# Altium PCB inAmp.PcbDoc
Units mm, origin at the board's own origin, x right, y up, seen from the top; angles counter-clockwise.
Board outline 100 x 50 mm, 2 copper layers (Top Layer, Bottom Layer); 21 components, 18 nets, 64 pads, 11 vias.
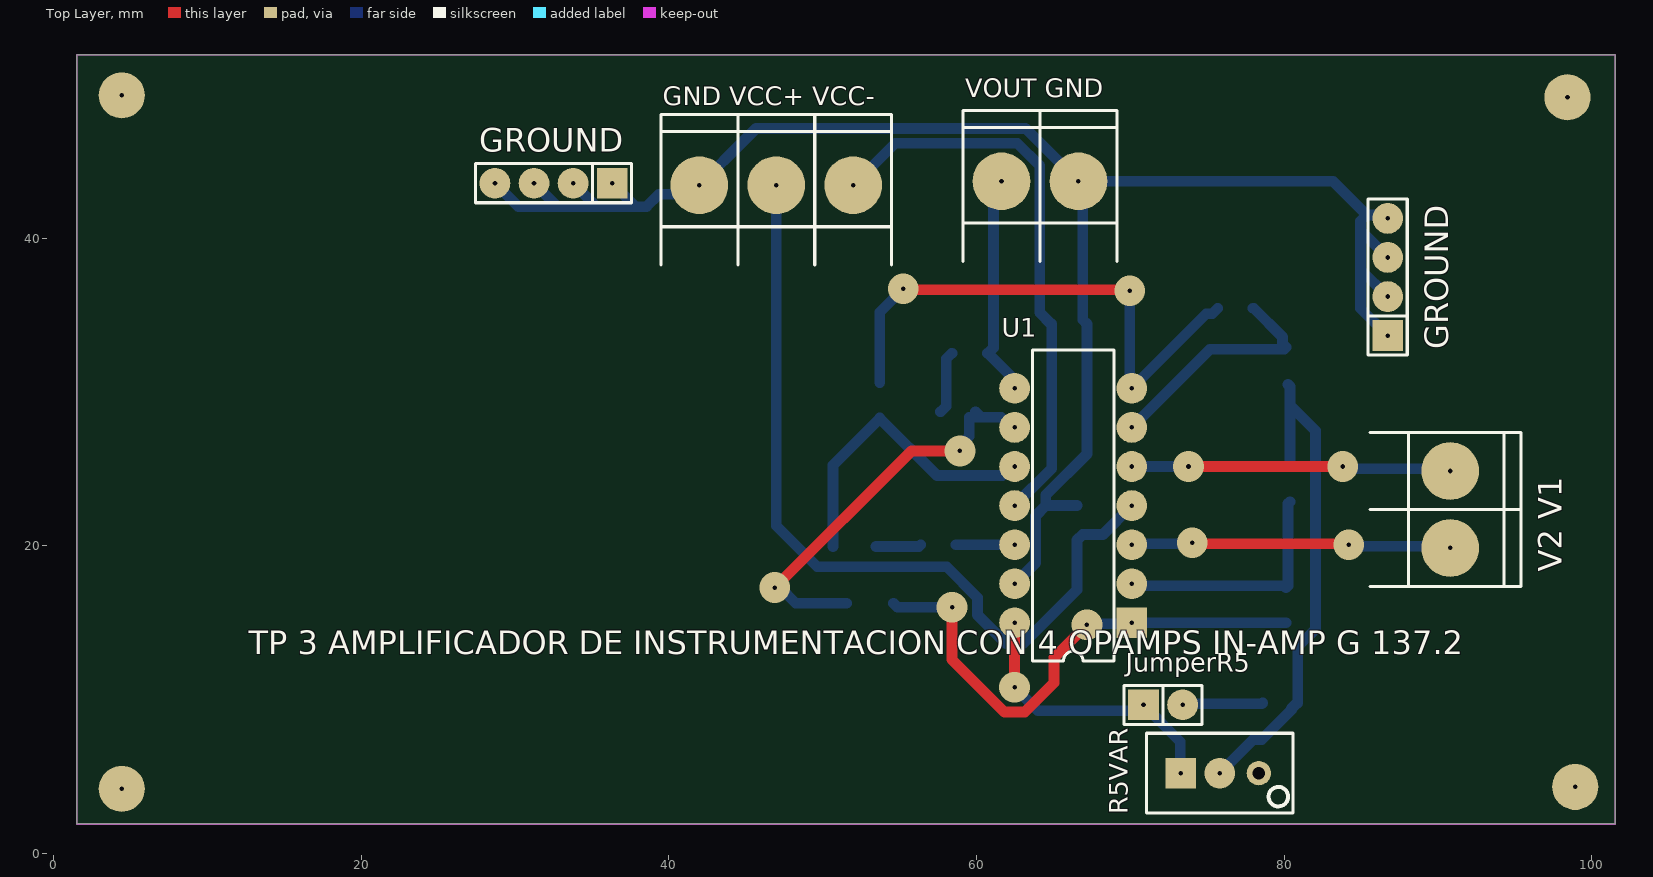
[diagram p0: Top Layer view]
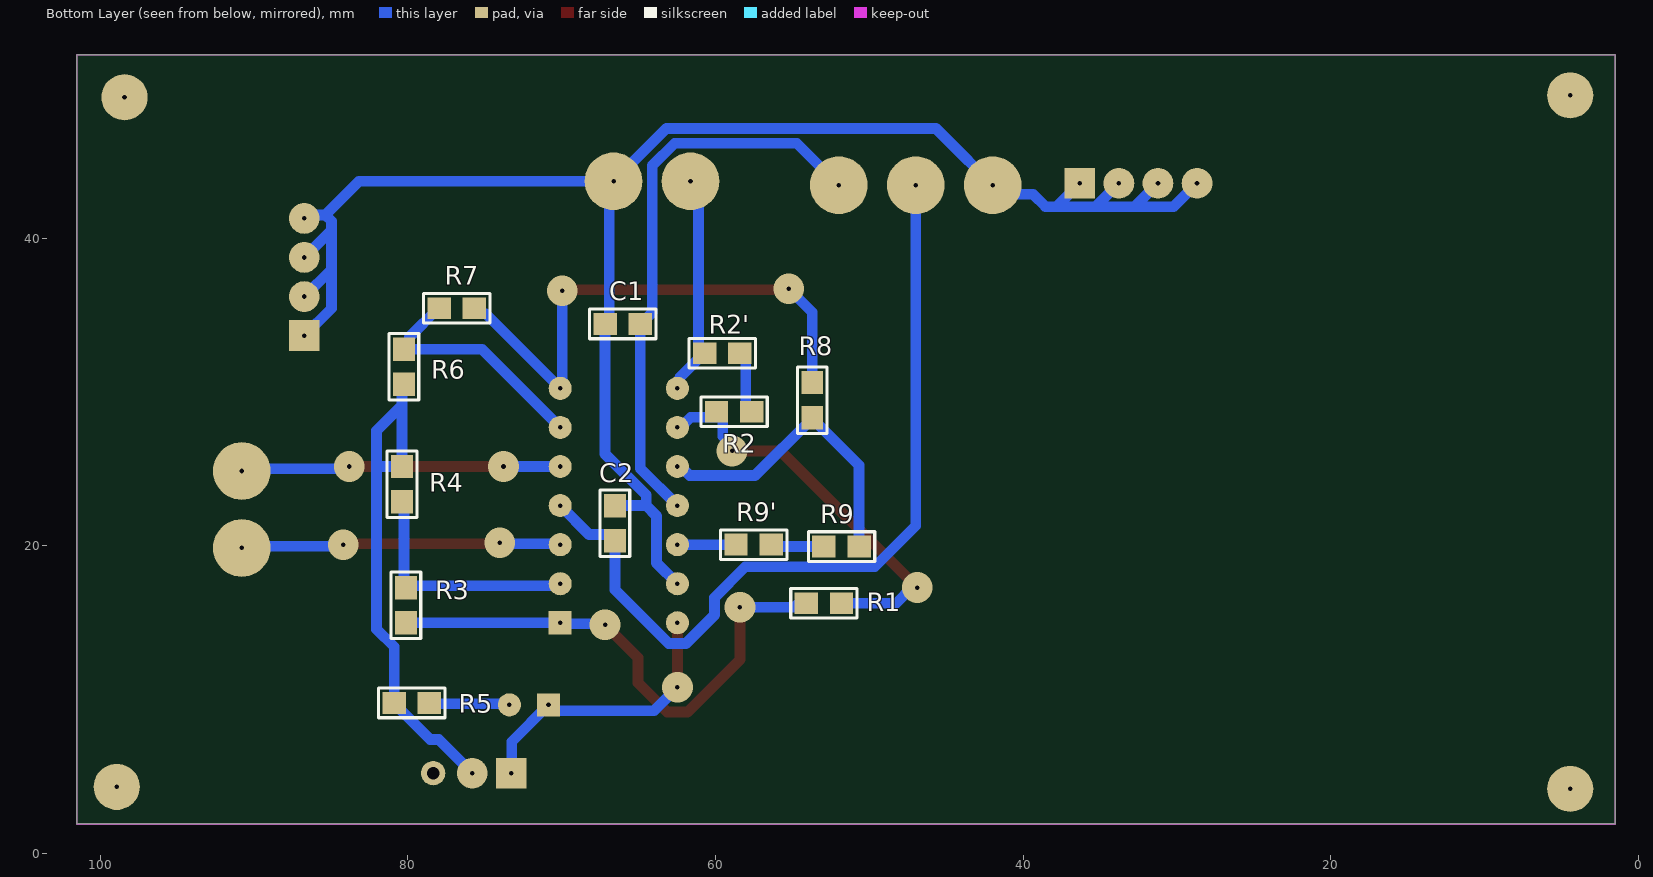
[diagram p1: Bottom Layer view, seen from below]
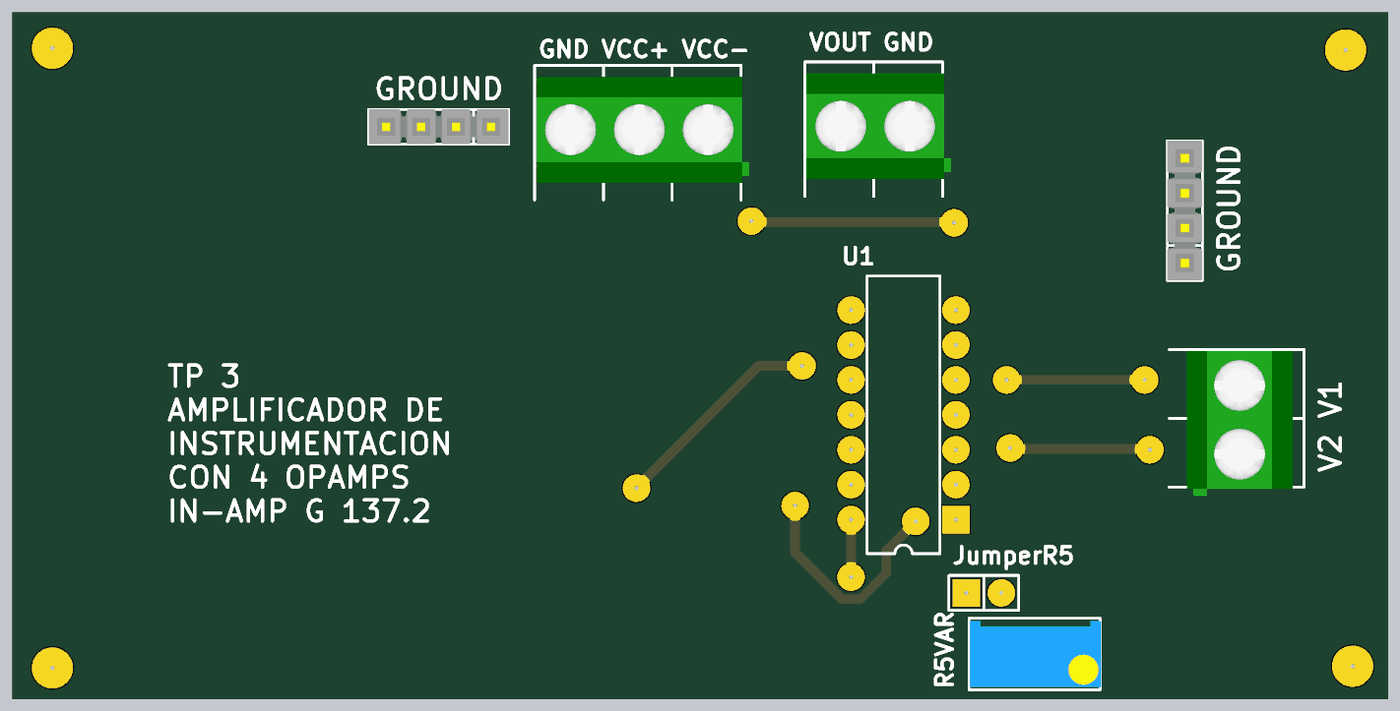
[diagram p2: 3D render of the assembled board from above, using the file's embedded part models]
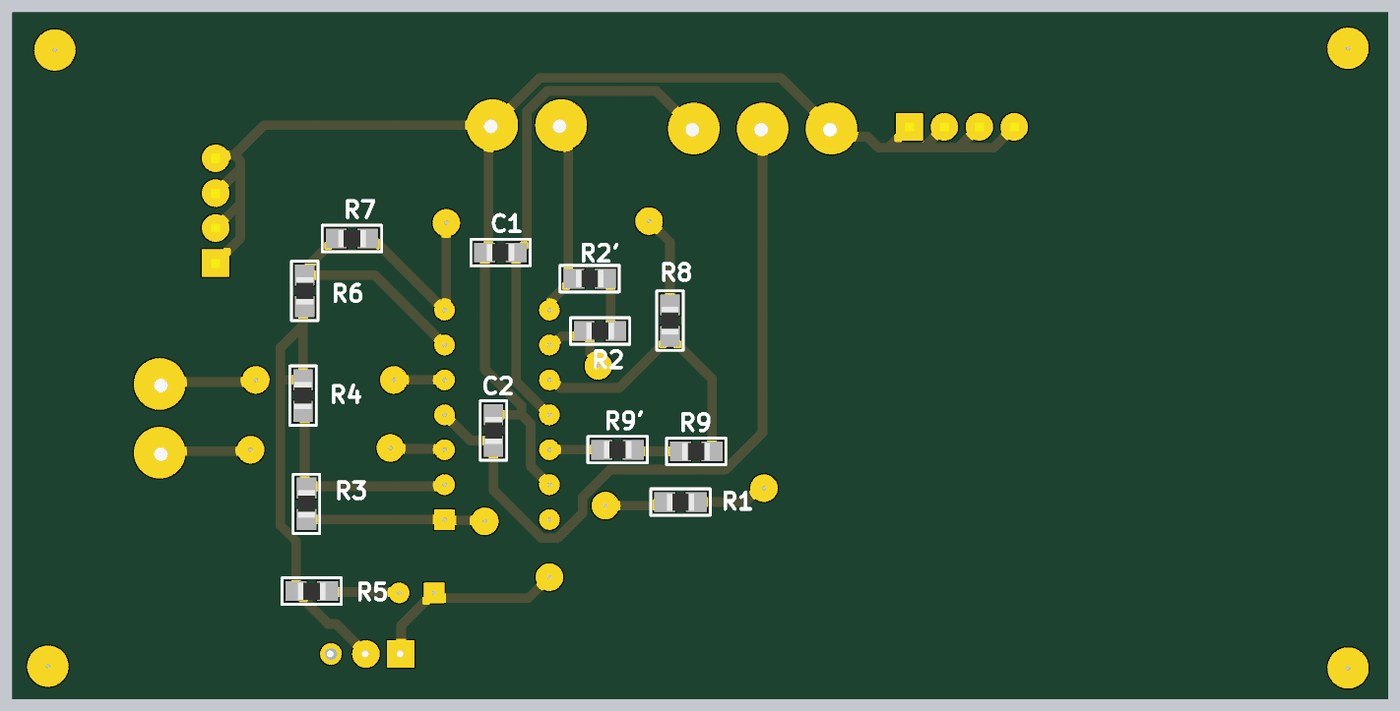
[diagram p3: 3D render of the assembled board from below, using the file's embedded part models]

## Layer stack, top to bottom
Top Solder: solder mask 0.0102, Solder Resist, Dk 3.5
Top Layer: signal copper 0.0356
Dielectric 1: dielectric 0.32, FR-4, Dk 4.8
Bottom Layer: signal copper 0.0356
Bottom Solder: solder mask 0.0102, Solder Resist, Dk 3.5

## Board outline
1.524,1.905 101.524,1.905 101.524,51.905 1.524,51.905

## Design rules (kind name [scope] priority, off if disabled: settings)
Clearance [All] p1: gap=0.254 ignorepadtopadclearanceinfootprint=FALSE except(0: Arc-Hole Track-Hole SMDPad-Hole THPad-Hole Via-Hole Fill-Hole Poly-Hole Region-Hole Text-Hole)
HoleSize [All] p1: absolutevalues=TRUE maxlimit=2.54 minlimit=0.3 maxpercent=80.000 minpercent=20.000
PolygonConnect [All] p1: connectstyle=Relief reliefconductorwidth=0.254 reliefentries=4 polygonreliefangle="90 Angle" airgapwidth=0.254
RoutingVias [All] p1: holewidth=0.711 width=1.27 viastyle="Through Hole" minholewidth=0.711 minwidth=1.27 maxholewidth=0.711 maxwidth=1.27
SolderMaskExpansion [All] p1: expansion=0.102
Width [All] p1: maxlimit=0.7 minlimit=0.7 preferedwidth=0.7 minimp=50.000000 maximp=50.000000 favimp=50.000000
29 further rules are at their usual default settings.

## Classes and differential pairs
component class inAmp: C1 C2 "GND VCC+ VCC-" GROUND R1 R2 R2' R3 R4 R5 R5VAR R6 R7 R8 R9 R9' U1 "V2 V1" "VOUT GND"

## Components (designator, comment, footprint, x,y, rotation, side; value= is the part's Value field where it differs from the comment)
C1 "1u" 0805 66.04,34.417 r180 bottom
C2 "1u" 0805 66.548,21.463 r270 bottom
"GND VCC+ VCC-" "ALIMENTACION" BORNERA3 46.99,43.434 r270 top (schematic designator "GND VCC- VCC+")
GROUND "4PINES" SIP4 32.512,43.561 r180 top (schematic designator GROUND2)
GROUND "4PINES" SIP4 86.741,37.465 r90 top
JumperR5 "PRESET" SIP2 72.136,9.652 r0 top
R1 "2K" 0805 52.959,16.256 r0 bottom
R2 "130k" 0805 58.801,28.702 r0 bottom
R2' "7.5k" 0805 59.563,32.512 r0 bottom
R3 "10k" 0805 80.137,16.129 r270 bottom
R4 "10k" 0805 80.391,24.003 r270 bottom
R5 "100k" 0805 79.756,9.779 r180 bottom
R5VAR "PRESET" "PRESET V" 75.819,5.207 r0 top
R6 "10k" 0805 80.264,31.623 r270 bottom
R7 "10k" 0805 76.835,35.433 r0 bottom
R8 "2K" 0805 53.721,29.464 r90 bottom
R9 "130k" 0805 51.816,19.939 r180 bottom
R9' "7.5k" 0805 57.531,20.066 r0 bottom
U1 "TL084J" J014 66.294,22.606 r90 top
"V2 V1" "BORNERA V1" BORNERA2 90.805,22.352 r180 top
"VOUT GND" "BORNERA OUT" BORNERA2 64.135,43.688 r270 top (schematic designator OUT)

## Footprints (in the part's own frame and the unit in brackets; to place one, negate y for a bottom-side part, rotate by r counter-clockwise, add the part's x,y. Pads: shape width x height; smd on the part's side, far side on the other; paste and mask are expansions set on the pad)
0805 [mil] "Pasivo 0805"
  rect 60x56 smd: 1(-45,0) 2(45,0)
  silkscreen extent -85,-38 85,38, body extent -39,-24 39,25, height 15
BORNERA2 [mm] "Bornera con Tornillos 5mm separación"
  round 3.75 hole 0.3: 1(0,2.5) 2(0,-2.5)
  silkscreen extent -4.6,-5 5.2,5, body extent -3.76,-4.89 3.94,5.61, height 10
BORNERA3 [mm] "Bornera con Tornillos 5mm separación"
  round 3.75 hole 0.3: 1(0,5) 2(0,0) 3(0,-5)
  silkscreen extent -4.6,-7.5 5.2,7.5, body extent -3.76,-7.39 3.94,8.11, height 10.05
J014 [mm] "DIP; 14 Leads; Row Spacing 7.62 mm; Pitch 2.54 mm"
  rect 2x2 / inner rect 1.5x1.5 / far side rect 1.5x1.5 hole 0.3: 1(-7.62,-3.81)
  round 2 / inner round 1.5 / far side round 1.5 hole 0.3: 2(-5.08,-3.81) 3(-2.54,-3.81) 4(0,-3.81) 5(2.54,-3.81) 6(5.08,-3.81) 7(7.62,-3.81) 8(7.62,3.81) 9(5.08,3.81) 10(2.54,3.81) 11(0,3.81) 12(-2.54,3.81) 13(-5.08,3.81) 14(-7.62,3.81)
  silkscreen extent -10.1,-2.65 10.1,2.65
"PRESET V" [mm]
  rect 2x2 hole 0.3: 1(-2.54,0)
  round 2 hole 0.3: 2(0,0)
  round 1.575 hole 0.813: 3(2.54,0)
  silkscreen extent -4.76,-2.6 4.76,2.6, body extent -4.7,-2.42 4.83,2.42, height 11.55
SIP2 [mm]
  rect 2x2 / inner rect 1.5x1.5 / far side rect 1.5x1.5 hole 0.3: 1(-1.27,0)
  round 2 / inner round 1.5 / far side round 1.5 hole 0.3: 2(1.27,0)
  silkscreen extent -2.54,-1.27 2.54,1.27
SIP4 [mm]
  rect 2x2 hole 0.3: 1(-3.81,0)
  round 2 hole 0.3: 2(-1.27,0) 3(1.27,0) 4(3.81,0)
  silkscreen extent -5.08,-1.27 5.08,1.27, body extent -5.08,-1.27 5.08,1.27, height 8.38

## Part data
C1 C2: library part CAP
"GND VCC+ VCC-": library part "BORNERA 3"
GROUND GROUND: library part CON4
JumperR5: library part CON2
R1 R2 R2' R3 R4 R5 R6 R7 R8 R9 R9': library part RES
U1: "JFET-Input Operational Amplifier", ComponentLink1Description="Manufacturer Link", ComponentLink1URL=http://www.ti.com/, ComponentLink2Description=Datasheet, ComponentLink2URL=http://www-s.ti.com/sc/ds/tl084.pdf, DatasheetVersion=Feb-1999, LatestRevisionDate=04-Mar-2005, LatestRevisionNote="Stylized 3D Model Added.", PackageDescription="DIP; 14 Leads; Row Spacing 7.62 mm; Pitch 2.54 mm", PackageReference=J014, PackageVersion=Jun-1999, Published=16-Jan-2001, Publisher="Altium Limited"
"V2 V1" "VOUT GND": library part "BORNERA 2"

## Free pads (board coordinates)
  round 3 hole 0.3: 2(4.445,49.276) 3(98.425,49.149) 4(98.933,4.318) 5(4.445,4.191)

## Via types
v1: diameter 2, hole 0.3, Top Layer to Bottom Layer, 11 vias

## Nets (pads, with @x,y where several pads share a name; then routed paths per layer and width w, separated by ;. In a path a pad name is that pad's centre, name@x,y a point inside that pad or via, vN(x,y) a via of type N, cw(c..) or ccw(c..) an arc to the next point about the centre after c; other vN are vias at no path point)
GND: "GND VCC+ VCC-.3" "VOUT GND.1" C1.1 C2.1 GROUND.1 GROUND.2 GROUND.3 GROUND.4 U1.13 | length 113.9
  Bottom Layer w0.7: GROUND.4@28.702,43.561 30.226,42.037 32.766,42.037 ; GROUND.3@31.242,43.561 32.766,42.037 ; GROUND.2@33.782,43.561 35.306,42.037 ; GROUND.1@36.322,43.561 37.846,42.037 ; U1.13 63.838,18.88 63.838,21.928 64.516,22.606 64.516,22.86 ; C2.1 64.77,22.606 64.516,22.86 ; GROUND.1@86.741,33.655 84.963,35.433 84.963,37.973 ; GROUND.2@86.741,36.195 84.963,37.973 ; GROUND.3@86.741,38.735 84.963,40.513 ; GROUND.4@86.741,41.275 86.513,41.503 85.373,41.503 ; 32.766,42.037 35.306,42.037 ; 35.306,42.037 37.846,42.037 ; 37.846,42.037 38.546,42.037 39.359,42.85 41.406,42.85 45.677,47.121 63.202,47.121 66.635,43.688 ; 64.516,22.86 64.516,23.289 67.183,25.956 C1.1 66.909,34.691 66.909,43.414 66.635,43.688 ; 66.635,43.688 83.188,43.688 85.373,41.503 ; 84.963,37.973 84.963,40.513 ; 84.963,40.513 84.963,41.093 85.373,41.503
NetJumperR5_2: JumperR5.2 R5.2 | length 5.4
  Bottom Layer w0.7: JumperR5.2@73.215,9.716 78.549,9.716 R5.2
NetR1_1: R1.1 R2.2 U1.9 | length 27.3
  Top Layer w0.7: v1(46.89,17.272) 55.78,26.162 v1(58.928,26.162)
  Bottom Layer w0.7: v1(46.89,17.272) 47.242,17.272 48.258,16.256 R1.1@51.562,16.256 ; v1@59.055,25.808 59.055,26.641 59.532,27.118 59.532,28.341 R2.2@60.305,28.341 ; R2.2 R2.2@60.305,28.341 ; U1.9 62.268,27.686 61.613,28.341 R2.2@60.305,28.341
NetR1_2: R1.2 R3.2 U1.1 | length 33.8
  Top Layer w0.7: v1(58.42,16.002) 58.42,12.591 61.82,9.191 63.148,9.191 65.041,11.084 65.041,12.717 v1(67.183,14.859)
  Bottom Layer w0.7: R1.2@54.61,16.256 54.864,16.002 v1(58.42,16.002) ; v1(67.183,14.859) 67.246,14.922 70.04,14.922 U1.1 R3.2
NetR2'_1: R2'.1 R2.1 | length 4.1
  Bottom Layer w0.7: R2.1 57.678,28.702 58.039,29.063 58.039,32.151 58.4,32.512 R2'.1
NetR3_1: R3.1 R4.2 U1.2 | length 15.8
  Bottom Layer w0.7: U1.2 70.231,17.399 80.01,17.399 R3.1 80.264,17.399 80.264,22.733 R4.2
NetR4_1: R4.1 R5.1 R5VAR.2 R6.2 | length 34.1
  Bottom Layer w0.7: R5VAR.2@76.2,5.207 76.2,5.588 78.003,7.391 78.552,7.391 80.487,9.326 80.487,9.418 80.848,9.779 R5.1 80.899,13.421 82.042,14.564 82.042,27.477 80.391,29.128 ; R6.2 80.391,30.353 80.391,29.128 ; 81.706,25.146 R4.1 80.391,29.128
NetR6_1: R6.1 R7.2 U1.6 | length 15.7
  Bottom Layer w0.7: U1.6 75.184,32.766 80.01,32.766 80.137,32.893 79.903,33.127 79.903,33.559 78.029,35.433 R7.2
NetR7_1: R7.1 R8.2 U1.7 | length 35.7
  Top Layer w0.7: v1(55.245,36.703) 55.308,36.639 69.913,36.639 v1(69.977,36.576)
  Bottom Layer w0.7: R8.2 53.721,35.179 v1(55.245,36.703) ; v1(69.977,36.576) 69.977,30.353 U1.7 74.95,35.072 75.331,35.072 R7.1
NetR8_1: R8.1 R9.2 U1.10 | length 20.2
  Bottom Layer w0.7: R9.2 50.673,25.222 R8.1@53.721,28.27 ; R8.1 R8.1@53.721,28.27 ; U1.10 62.268,25.146 61.68,24.558 57.433,24.558 R8.1@53.721,28.27
NetR9'_1: R9'.1 R9.1 | length 3
  Bottom Layer w0.7: R9.1@53.467,19.939 56.261,19.939 R9'.1
NetR9'_2: R9'.2 U1.12 | length 3.8
  Bottom Layer w0.7: R9'.2 U1.12
V1: "V2 V1.1" U1.3 | length 20.9
  Top Layer w0.7: v1(74.041,20.193) 74.105,20.13 84.138,20.13 v1(84.201,20.066)
  Bottom Layer w0.7: U1.3 70.168,20.13 73.977,20.13 v1(74.041,20.193) ; v1(84.201,20.066) 84.308,19.959 90.698,19.959 90.805,19.852
V2: "V2 V1.2" U1.5 | length 20.8
  Top Layer w0.7: v1(73.787,25.146) v1(83.82,25.146)
  Bottom Layer w0.7: U1.5 v1(73.787,25.146) ; v1(83.82,25.146) 83.967,24.999 90.658,24.999 90.805,24.852
VCC+: "GND VCC+ VCC-.2" C2.2 U1.4 | length 54.7
  Bottom Layer w0.7: 46.99,43.434 46.99,21.295 49.661,18.624 58.067,18.624 60.071,16.62 60.071,15.485 61.923,13.632 63.045,13.632 66.548,17.135 66.548,20.371 66.909,20.732 68.23,20.732 U1.4
VCC-: "GND VCC+ VCC-.1" C1.2 U1.11 | length 37.3
  Bottom Layer w0.7: 51.99,43.434 54.723,46.167 62.662,46.167 64.114,44.715 64.114,35.149 64.846,34.417 C1.2 64.897,25.019 U1.11
Vfeed: JumperR5.1 R5VAR.1 U1.14 | length 17.9
  Top Layer w0.7: v1(62.484,10.795) U1.14
  Bottom Layer w0.7: v1(62.484,10.795) 64.008,9.271 70.104,9.271 ; JumperR5.1 73.261,7.257 73.261,5.225 R5VAR.1
Vout: "VOUT GND.2" R2'.2 U1.8 | length 13.5
  Bottom Layer w0.7: R2'.2 R2'.2@60.757,32.512 ; 61.635,42.418 61.257,42.418 61.118,42.279 61.118,32.873 R2'.2@60.757,32.512 ; U1.8 62.331,30.379 62.331,30.938 R2'.2@60.757,32.512
pads on no net: R5VAR.3

## Keep-outs
Keep-Out Layer:
  the board outline again, w0.1

## Silkscreen, mask and mechanical layers (free items; w line width, h text height)
Top Overlay:
  text "TP 3 AMPLIFICADOR DE INSTRUMENTACION CON 4 OPAMPS IN-AMP G 137.2" at 12.7,12.954 h1.52